# Altium PCB RcMPPT-BMS.PcbDoc
Units mil, origin at the board's own origin, x right, y up, seen from the top; angles counter-clockwise.
Board outline 3900 x 2200 mil, 2 copper layers (Top Layer, Bottom Layer), stack 61.756 mil thick; 5 components, 0 nets, 92 pads, 0 vias.
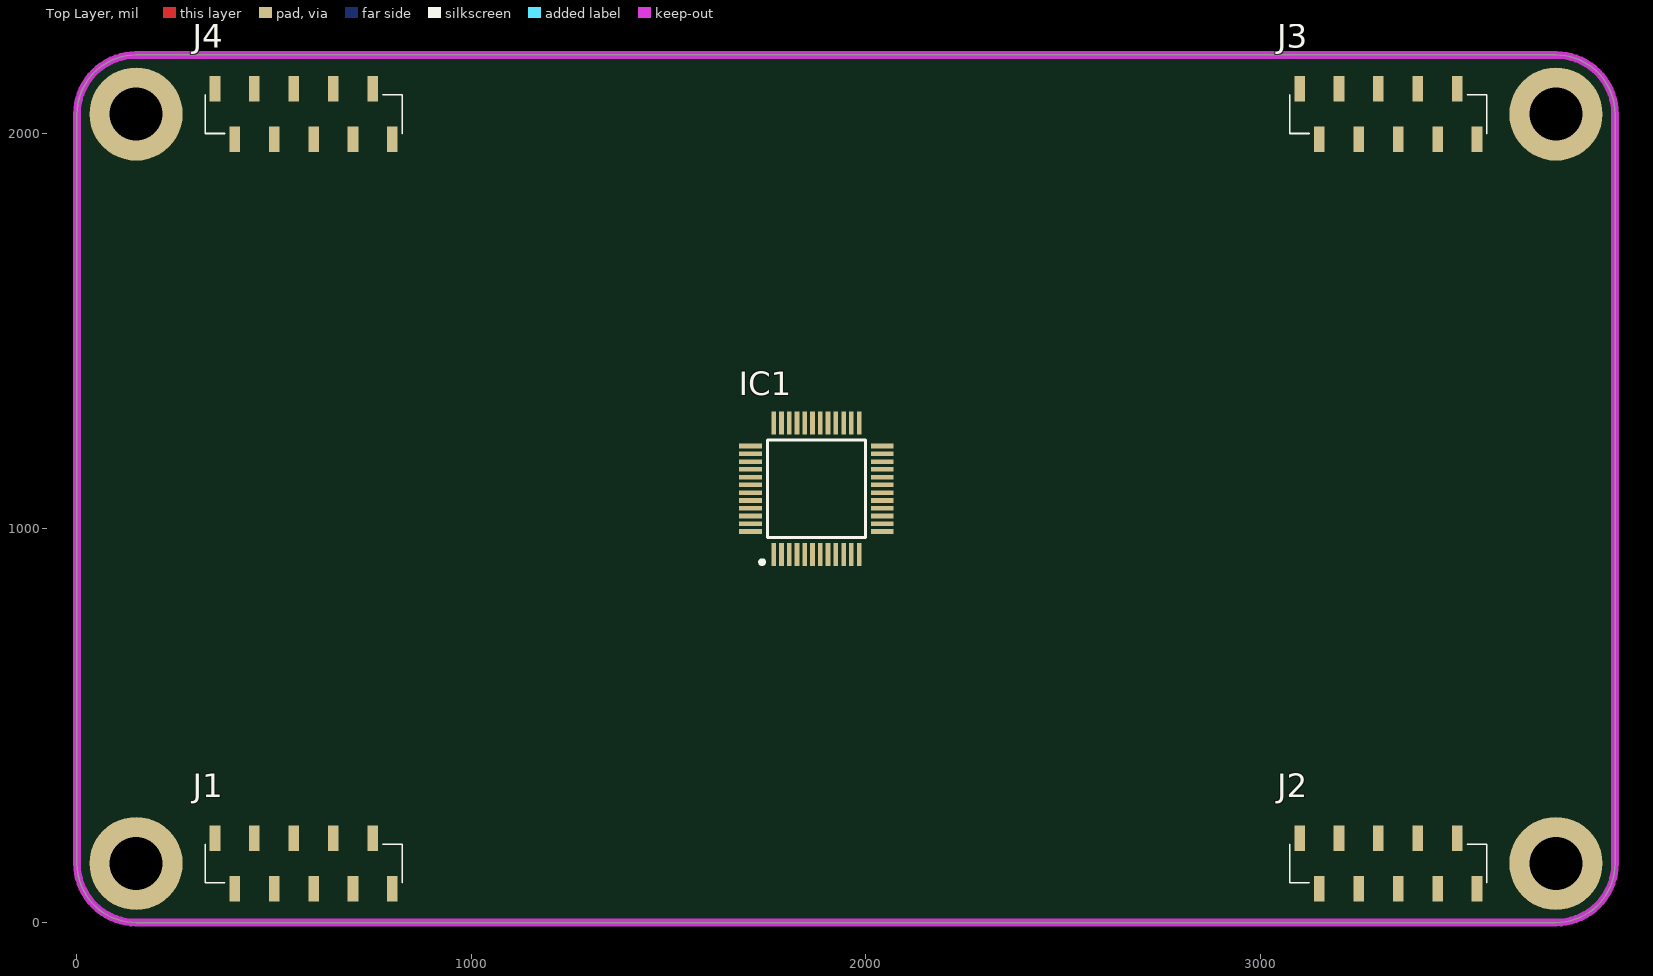
[diagram p0: Top Layer view]
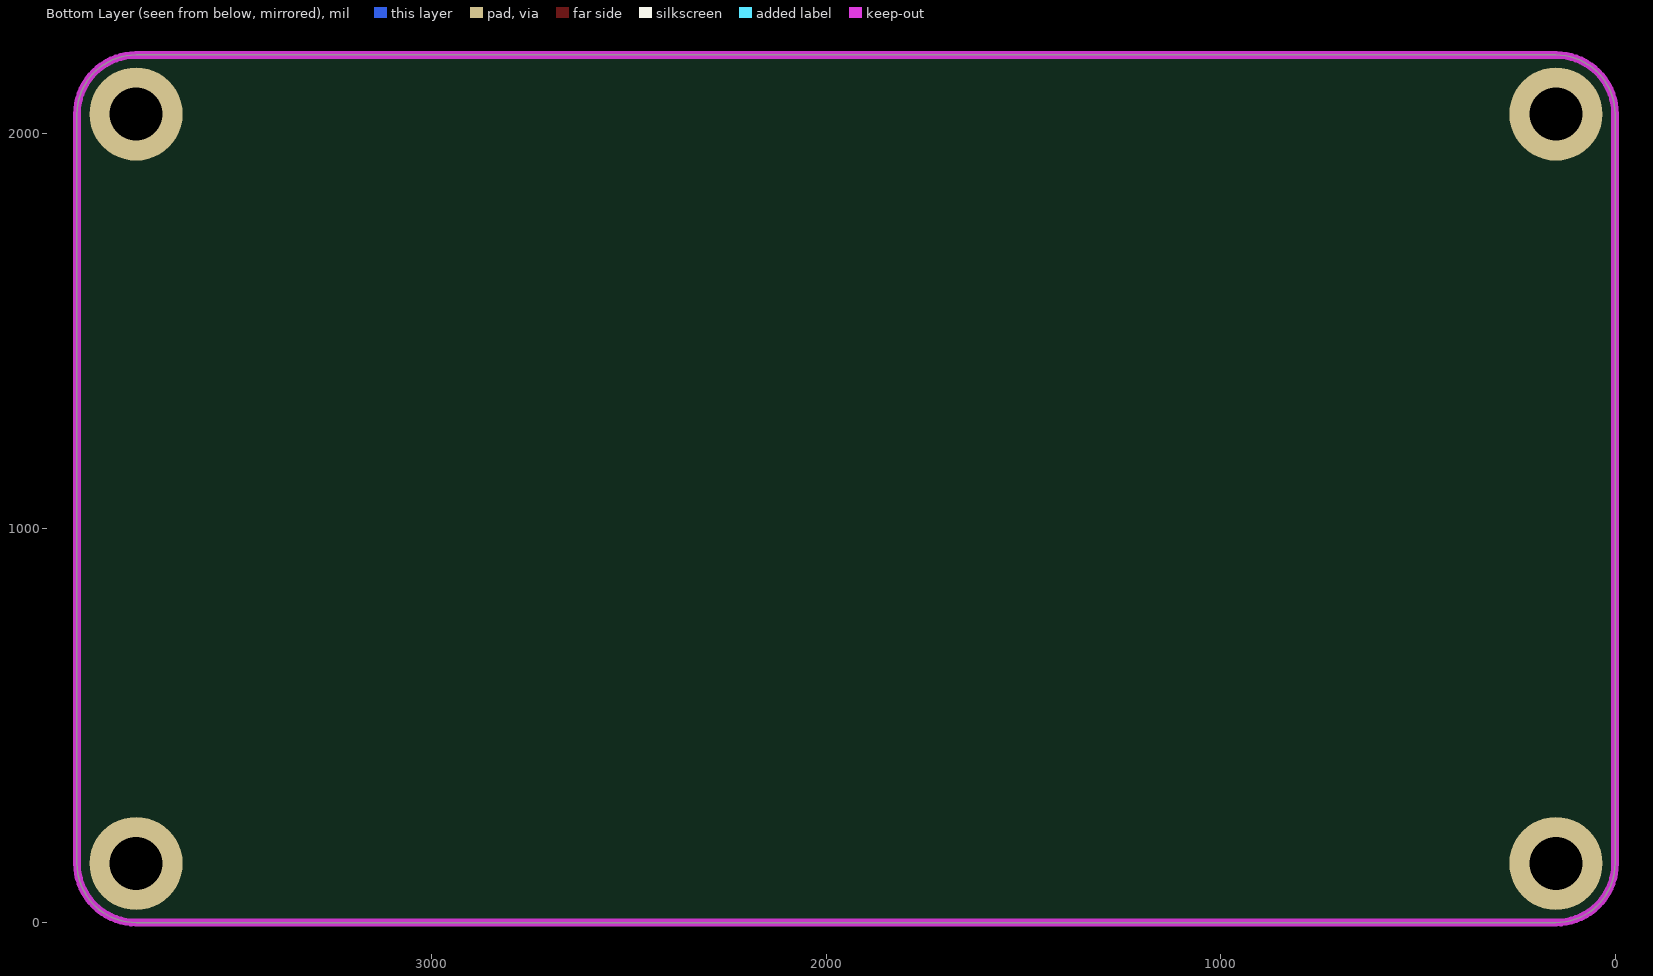
[diagram p1: Bottom Layer view, seen from below]

## Layer stack, top to bottom
Top Solder: solder mask 1, SM-001, Dk 4
Top Layer: signal copper 1.378
Dielectric 1: core 59, Core-043, Dk 4.3
Bottom Layer: signal copper 1.378
Bottom Solder: solder mask 1, SM-001, Dk 4

## Board outline
0,150 0,2050 cw(c150,2050) 150,2200 3750,2200 cw(c3750,2050) 3900,2050 3900,150 cw(c3750,150) 3750,0 150,0 cw(c150,150)

## Design rules (kind name [scope] priority, off if disabled: settings)
Clearance [All] p1: gap=10 ignorepadtopadclearanceinfootprint=FALSE except(0: Arc-Hole Track-Hole SMDPad-Hole THPad-Hole Via-Hole Fill-Hole Poly-Hole Region-Hole Text-Hole)
PolygonConnect [All] p1: connectstyle=Relief reliefconductorwidth=10 reliefentries=4 polygonreliefangle="90 Angle" airgapwidth=10
RoomDefinition RcMPPT-BMS [InComponentClass('RcMPPT-BMS')] p1: confinementstyle=ConfineIn formatcopy=TRUE lockcomponents=FALSE outline -2350,-2060 -350,-2060 -350,-1060 -2350,-1060
RoutingVias [All] p1: holewidth=28 width=50 viastyle="Through Hole" minholewidth=28 minwidth=50 maxholewidth=28 maxwidth=50
SolderMaskExpansion [All] p1: expansion=4 istentingtop=FALSE
Width [All] p1: maxlimit=10 minlimit=10 preferedwidth=10
30 further rules are at their usual default settings.

## Components (designator, comment, footprint, x,y, rotation, side; value= is the part's Value field where it differs from the comment)
IC1 "BQ76952PFBR" QFP50P900X900X120-48N 1875,1100 r90 top
J1 "M52-5051045" M525051045 575,150 r0 top locked
J2 "M52-5051045" M525051045 3325,150 r0 top locked
J3 "M52-5051045" M525051045 3325,2050 r0 top locked
J4 "M52-5051045" M525051045 575,2050 r0 top locked

## Footprints (in the part's own frame and the unit in brackets; to place one, negate y for a bottom-side part, rotate by r counter-clockwise, add the part's x,y. Pads: shape width x height; smd on the part's side, far side on the other; paste and mask are expansions set on the pad)
M525051045 [mm]
  rect 0.68x1.65 smd: 1(-5.715,1.625) 2(-4.445,-1.625) 3(-3.175,1.625) 4(-1.905,-1.625) 5(-0.635,1.625) 6(0.635,-1.625) 7(1.905,1.625) 8(3.175,-1.625) 9(4.445,1.625) 10(5.715,-1.625)
  silkscreen extent -6.35,-1.25 6.35,1.25, body extent -6.35,-2.38 6.35,2.38, height 5.8
QFP50P900X900X120-48N [mm]
  rect 1.475x0.3 smd: 1(-4.238,2.75) 2(-4.238,2.25) 3(-4.238,1.75) 4(-4.238,1.25) 5(-4.238,0.75) 6(-4.238,0.25) 7(-4.238,-0.25) 8(-4.238,-0.75) 9(-4.238,-1.25) 10(-4.238,-1.75) 11(-4.238,-2.25) 12(-4.238,-2.75) 25(4.238,-2.75) 26(4.238,-2.25) 27(4.238,-1.75) 28(4.238,-1.25) 29(4.238,-0.75) 30(4.238,-0.25) 31(4.238,0.25) 32(4.238,0.75) 33(4.238,1.25) 34(4.238,1.75) 35(4.238,2.25) 36(4.238,2.75)
  rect 0.3x1.475 smd: 13(-2.75,-4.238) 14(-2.25,-4.238) 15(-1.75,-4.238) 16(-1.25,-4.238) 17(-0.75,-4.238) 18(-0.25,-4.238) 19(0.25,-4.238) 20(0.75,-4.238) 21(1.25,-4.238) 22(1.75,-4.238) 23(2.25,-4.238) 24(2.75,-4.238) 37(2.75,4.238) 38(2.25,4.238) 39(1.75,4.238) 40(1.25,4.238) 41(0.75,4.238) 42(0.25,4.238) 43(-0.25,4.238) 44(-0.75,4.238) 45(-1.25,4.238) 46(-1.75,4.238) 47(-2.25,4.238) 48(-2.75,4.238)
  silkscreen extent -4.85,-3.15 3.15,3.62, body extent -4.5,-4.5 4.5,4.5, height 1.2

## Part data
IC1: "Integrated Circuit", Manufacturer_Name="Texas Instruments", Datasheet Link=https://www.ti.com/lit/ds/symlink/bq76952.pdf?ts=1602524050348&ref_url=https%253A%252F%252Fwww.ti.com%252Fproduct%252FBQ76952%253FkeyMatch%253DBQ76952PFBR%2526tisearch%253DSearch-EN-everything%2526usecase%253DOPN, Height=1.2mm, Manufacturer_Part_Number=BQ76952PFBR
J1 J2 J3 J4: "Connector", Manufacturer_Name=Harwin, Mouser Part Number=855-M52-5051045, Datasheet Link=https://cdn.harwin.com/pdfs/M52-505.pdf, Height=5.7mm, Manufacturer_Part_Number=M52-5051045, Mouser Price/Stock=https://www.mouser.co.uk/ProductDetail/Harwin/M52-5051045?qs=Jph8NoUxIfVdgQJihAwiug%3D%3D

## Free pads (board coordinates)
  round 236.22 hole 133.86: 2(150,150) 2(150,2050) 2(3750,150) 2(3750,2050)

## Nets (pads, with @x,y where several pads share a name; then routed paths per layer and width w, separated by ;. In a path a pad name is that pad's centre, name@x,y a point inside that pad or via, vN(x,y) a via of type N, cw(c..) or ccw(c..) an arc to the next point about the centre after c; other vN are vias at no path point)
pads on no net: IC1.1 IC1.2 IC1.3 IC1.4 IC1.5 IC1.6 IC1.7 IC1.8 IC1.9 IC1.10 IC1.11 IC1.12 IC1.13 IC1.14 IC1.15 IC1.16 IC1.17 IC1.18 IC1.19 IC1.20 IC1.21 IC1.22 IC1.23 IC1.24 IC1.25 IC1.26 IC1.27 IC1.28 IC1.29 IC1.30 IC1.31 IC1.32 IC1.33 IC1.34 IC1.35 IC1.36 IC1.37 IC1.38 IC1.39 IC1.40 IC1.41 IC1.42 IC1.43 IC1.44 IC1.45 IC1.46 IC1.47 IC1.48 J1.1 J1.2 J1.3 J1.4 J1.5 J1.6 J1.7 J1.8 J1.9 J1.10 J2.1 J2.2 J2.3 J2.4 J2.5 J2.6 J2.7 J2.8 J2.9 J2.10 J3.1 J3.2 J3.3 J3.4 J3.5 J3.6 J3.7 J3.8 J3.9 J3.10 J4.1 J4.2 J4.3 J4.4 J4.5 J4.6 J4.7 J4.8 J4.9 J4.10

## Keep-outs
Keep-Out Layer:
  the board outline again, w19.68

## Silkscreen, mask and mechanical layers (free items; w line width, h text height)
Board:
  the board outline again, w10